# EAGLE board BMS-LV (EAGLE 7.5.0)
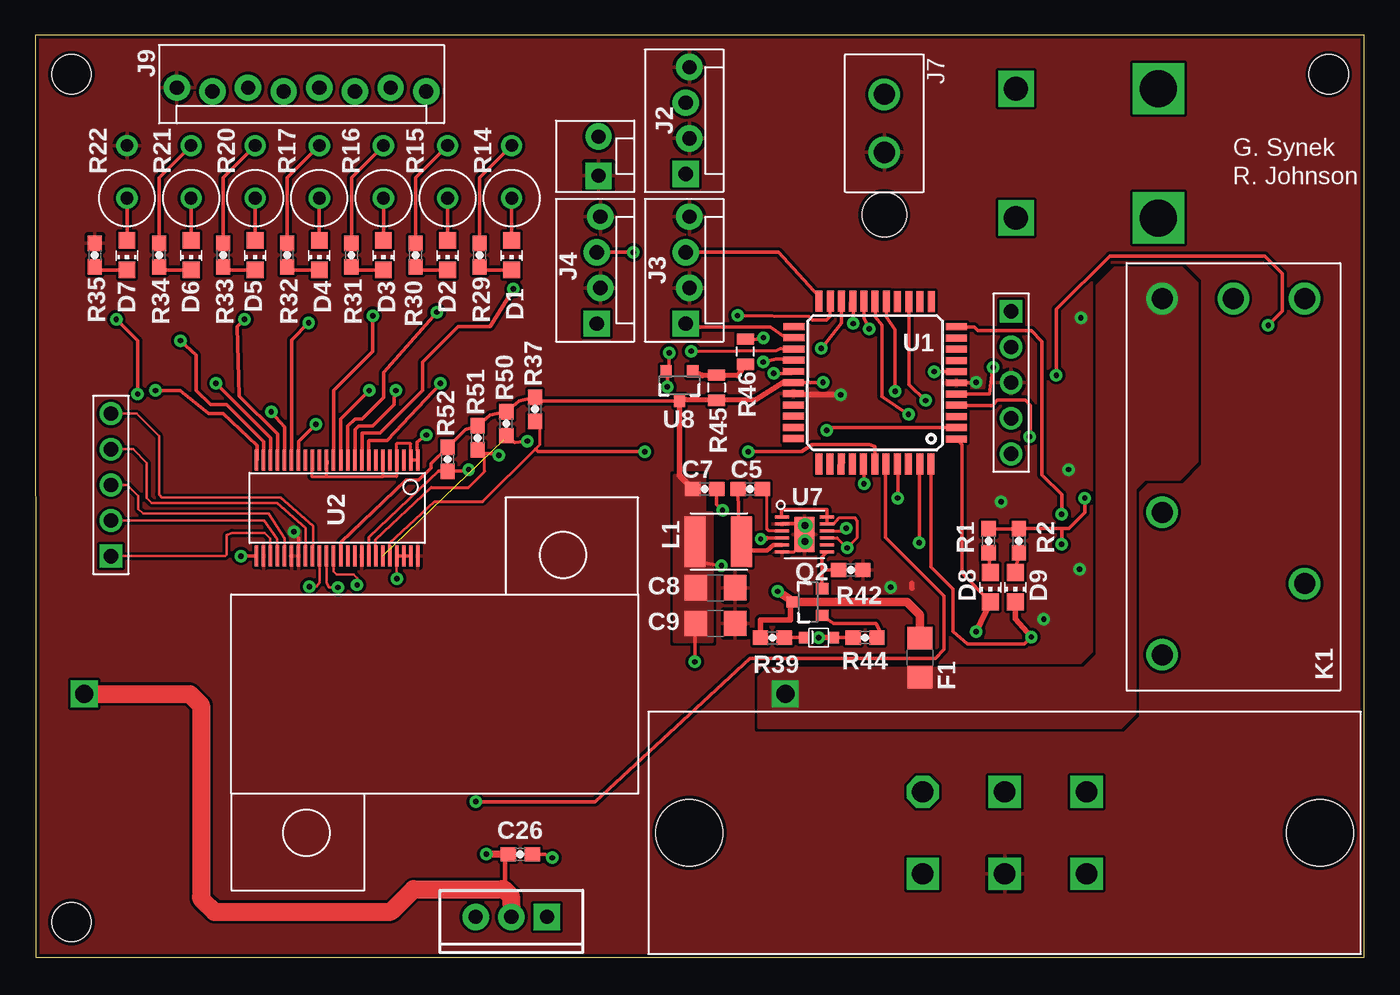
[diagram p0: board, top side]
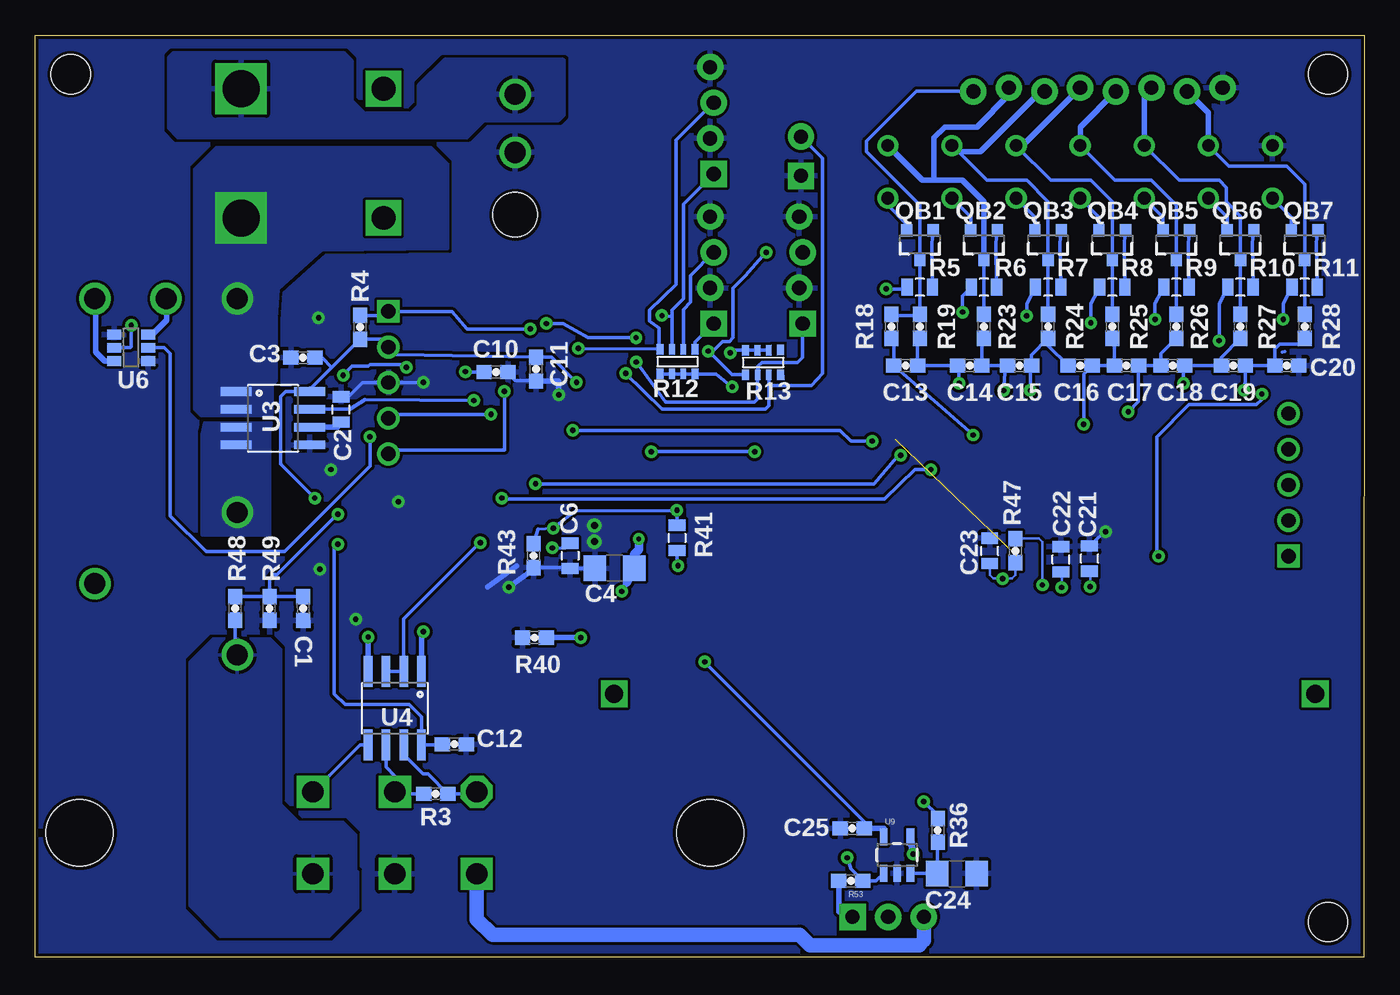
[diagram p1: board, bottom side, seen from below]

Size 94.79 x 65.79 mm. Coordinates in mm from the lower left corner, seen from the top.
Outline: 94.79,0 94.79,65.79 0,65.79 0.05,0 94.79,0
Copper layers (1*16): Top 0.035mm / dielectric 1.5mm / Bottom 0.035mm
Design rules "SparkFun *": minimum track width 7mil, minimum drill 12mil, track to track 8mil, track to pad 8mil, pad to pad 8mil, via to via 8mil, smd to smd 8mil, copper to edge 10mil, drill to drill 8mil, minimum pad ring 12mil, minimum via ring 10mil, stop-mask expansion 4mil, vias tented up to drill 25mil, thermal gap 10mil
Holes 2.8 mm at 92.25,62.99 2.59,62.99 2.59,2.54

## Footprints (pad centres in the part's own frame; a part is rotated, then mirrored left to right if it is on the bottom)
0603 = smd 1.1 x 1: 1 -0.85,0; 2 0.85,0
0805 = smd 0.8 x 1.2: 1 -0.9,0; 2 0.9,0
1206@1 = smd 1.6 x 1.8: 1 -1.4,0; 2 1.4,0
CHIP_LED0805 = smd 1.2 x 1.2: A 0,-1.05; C 0,1.05
SOD-323 = smd 0.65 x 0.85: P$1 -1.1,0; P$2 1.1,0
FUSECLIP-3550 = drill 2.642 square: 1 -4.61,5.08; 2 4.61,5.08 | drill 1.702 square: 3 4.61,-5.08; 4 -4.61,-5.08
5X.1 = drill 1.016 square: 1 -5.08,0 | drill 1.016: 2 -2.54,0; 3 0,0; 4 2.54,0; 5 5.08,0
MOLEX_1X4 = drill 1.016 pad 1.88 square: 1 -3.81,0.127 | drill 1.016 pad 1.88: 2 -1.27,-0.127; 3 1.27,0.127; 4 3.81,-0.127
MOLEX-1X2 = drill 1.016 pad 1.88 square: 1 -1.397,0 | drill 1.016 pad 1.88: 2 1.397,0
MOLEX-MX150L = drill 1.524 octagon: 1 -5.842,2.921 | drill 1.524 square: 2 0,2.921; 3 5.842,2.921; 4 -5.842,-2.921; 5 0,-2.921; 6 5.842,-2.921 | hole 4.775: -22.479,0; 22.479,0
1-770166-0 = drill 1.5: 1 -2.07,0; 2 2.07,0 | hole 3.18: 6.52,0
MOLEX-1X8-2 = drill 1.016 pad 1.88: 1 -8.89,0; 2 -6.35,-0.254; 3 -3.81,0; 4 -1.27,-0.254; 5 1.27,0; 6 3.81,-0.254; 7 6.35,0; 8 8.89,-0.254
ADJ14024 = drill 1.5: -8-S 0,5.08; -9-R 0,0; C 25.4,-5.08; C+ 0,-5.08; NC 20.32,5.08; NO 15.24,-5.08
SRN4018 = smd 1.5 x 3.6: P$1 -1.6,0; P$2 1.7,0
SOT23 = smd 0.8 x 0.9: 1 -0.95,-1; 2 0.95,-1; 3 0,1.1
TO-220 = drill 1 pad 1.88 square: 1 -2.54,0 | drill 1 pad 1.88: 2 0,0; 3 2.54,0
MNR14 = smd 0.5 x 0.75: 1 -1.25,-0.9; 4 1.25,-0.9; 5 1.25,0.85; 8 -1.25,0.85 | smd 0.4 x 0.75: 2 -0.4,-0.9; 3 0.4,-0.9; 6 0.4,0.85; 7 -0.4,0.85
RR02J16RTB = drill 0.9: P$1 -3.75,0; P$2 0,0
CHASSIS-MNT-RES-TE-HSA25 = drill 1.27 square: 1 -25,0; 2 25,0
TQFP-44 = smd 1.5 x 0.5: 1 -5.8,4; 2 -5.8,3.2; 3 -5.8,2.4; 4 -5.8,1.6; 5 -5.8,0.8; 6 -5.8,0; 7 -5.8,-0.8; 8 -5.8,-1.6; 9 -5.8,-2.4; 10 -5.8,-3.2; 11 -5.8,-4; 23 5.8,-4; 24 5.8,-3.2; 25 5.8,-2.4; 26 5.8,-1.6; 27 5.8,-0.8; 28 5.8,0; 29 5.8,0.8; 30 5.8,1.6; 31 5.8,2.4; 32 5.8,3.2; 33 5.8,4 | smd 0.5 x 1.5: 12 -4,-5.8; 13 -3.2,-5.8; 14 -2.4,-5.8; 15 -1.6,-5.8; 16 -0.8,-5.8; 17 0,-5.8; 18 0.8,-5.8; 19 1.6,-5.8; 20 2.4,-5.8; 21 3.2,-5.8; 22 4,-5.8; 34 4,5.8; 35 3.2,5.8; 36 2.4,5.8; 37 1.6,5.8; 38 0.8,5.8; 39 0,5.8; 40 -0.8,5.8; 41 -1.6,5.8; 42 -2.4,5.8; 43 -3.2,5.8; 44 -4,5.8
SSOP-48 = smd 0.25 x 1.524: 1 -5.75,-3.421; 2 -5.25,-3.421; 3 -4.75,-3.421; 4 -4.25,-3.421; 5 -3.75,-3.421; 6 -3.25,-3.421; 7 -2.75,-3.421; 8 -2.25,-3.421; 9 -1.75,-3.421; 10 -1.25,-3.421; 11 -0.75,-3.421; 12 -0.25,-3.421; 13 0.25,-3.421; 14 0.75,-3.421; 15 1.25,-3.421; 16 1.75,-3.421; 17 2.25,-3.421; 18 2.75,-3.421; 19 3.25,-3.421; 20 3.75,-3.421; 21 4.25,-3.421; 22 4.75,-3.421; 23 5.25,-3.421; 24 5.75,-3.421; 25 5.75,3.421; 26 5.25,3.421; 27 4.75,3.421; 28 4.25,3.421; 29 3.75,3.421; 30 3.25,3.421; 31 2.75,3.421; 32 2.25,3.421; 33 1.75,3.421; 34 1.25,3.421; 35 0.75,3.421; 36 0.25,3.421; 37 -0.25,3.421; 38 -0.75,3.421; 39 -1.25,3.421; 40 -1.75,3.421; 41 -2.25,3.421; 42 -2.75,3.421; 43 -3.25,3.421; 44 -3.75,3.421; 45 -4.25,3.421; 46 -4.75,3.421; 47 -5.25,3.421; 48 -5.75,3.421
SO-8 = smd 0.61 x 2.21: 1 -1.905,-2.616; 2 -0.635,-2.616; 3 0.635,-2.616; 4 1.905,-2.616; 5 1.905,2.616; 6 0.635,2.616; 7 -0.635,2.616; 8 -1.905,2.616
SC74-6 = smd 0.7 x 1: 1 -0.95,-1.2; 2 0,-1.2; 3 0.95,-1.2; 4 0.95,1.2; 5 0,1.2; 6 -0.95,1.2
DFN-12 = smd 0.23 x 1: 1 1.25,1.6; 2 0.75,1.6; 3 0.25,1.6; 4 -0.25,1.6; 5 -0.75,1.6; 6 -1.25,1.6; 7 -1.25,-1.6; 8 -0.75,-1.6; 9 -0.25,-1.6; 10 0.25,-1.6; 11 0.75,-1.6; 12 1.25,-1.6 | smd 2.5 x 1.4: 13 0,0
SOT23-5 = smd 0.55 x 1.2: 1 -0.95,-1.3; 2 0,-1.3; 3 0.95,-1.3; 4 0.95,1.3; 5 -0.95,1.3

## Placement (x,y rotation side)
C1  0.1uF  [0603]  75.67,24.89 270.3 bottom
C2  0.1uF  [0805]  72.97,39.09 90 bottom
C3  0.1uF  [0603]  75.69,42.77 180 bottom
C4  4.7uF  [1206@1]  53.47,27.76 180 bottom
C5  0.1uF  [0603]  50.99,33.41 0 top
C6  1uF  [0805]  56.64,28.65 270 bottom
C7  100pF  [0603]  47.75,33.41 0 top
C8  10uF  [1206@1]  48.51,26.37 0 top
C9  10uF  [1206@1]  48.51,23.83 0 top
C10  0.1uF  [0603]  61.93,41.76 0 bottom
C11  0.1uF  [0603]  59.08,41.96 270 bottom
C12  0.1uF  [0603]  64.9,15.21 0 bottom
C13  10nF  [0603]  32.72,42.21 0 bottom
C14  10nF  [0603]  28.14,42.21 0 bottom
C15  10nF  [0603]  24.59,42.21 0 bottom
C16  10nF  [0603]  20.27,42.21 0 bottom
C17  10nF  [0603]  16.97,42.21 0 bottom
C18  10nF  [0603]  13.67,42.21 0 bottom
C19  10nF  [0603]  9.35,42.21 0 bottom
C20  10nF  [0603]  5.54,42.21 0 bottom
C21  1uF  [0805]  19.61,28.45 90 bottom
C22  1uF  [0805]  21.64,28.4 90 bottom
C23  1uF  [0805]  26.72,29.01 90 bottom
C24  10uF  [1206@1]  29.06,5.99 0 bottom
C25  0.1uF  [0603]  36.53,9.22 180 bottom
C26  0.1uF  [0603]  34.59,7.37 180 top
D1  LED_GREEN  [CHIP_LED0805]  33.99,50.09 180 top
D2  LED_GREEN  [CHIP_LED0805]  29.41,50.09 180 top
D3  LED_GREEN  [CHIP_LED0805]  24.84,50.09 180 top
D4  LED_GREEN  [CHIP_LED0805]  20.27,50.09 180 top
D5  LED_GREEN  [CHIP_LED0805]  15.7,50.09 180 top
D6  LED_GREEN  [CHIP_LED0805]  11.13,50.09 180 top
D7  LED_GREEN  [CHIP_LED0805]  6.55,50.09 180 top
D8  LED_AMBER  [CHIP_LED0805]  68.12,26.42 180 top
D9  LED_GREEN  [CHIP_LED0805]  69.9,26.42 180 top
D10  22V  [SOD-323]  55.88,22.81 0 top
F1  0.12A 48V PTC  [1206@1]  63.09,21.39 90 top
F2  FUSE CLIPS  [FUSECLIP-3550]  75.03,57.35 270 top
J1  M1x5  [5X.1]  69.6,41 270 top
J2  M1x4  [MOLEX_1X4]  46.53,59.69 90 top
J3  M1x4  [MOLEX_1X4]  46.53,49.02 90 top
J4  M1x4  [MOLEX_1X4]  40.18,49.02 90 top
J5  M1x2  [MOLEX-1X2]  40.18,57.15 90 top
J6  MX150L  [MOLEX-MX150L]  69.14,8.89 0 top
J7  M2770166  [1-770166-0]  60.55,59.49 270 top
J8  M1x5  [5X.1]  5.41,33.71 90 top
J9  M80022232081-2  [MOLEX-1X8-2]  19,62.03 0 top
K1  ADJ14024  [ADJ14024]  85.45,46.99 270 top
L1  SRN4018-220M  [SRN4018]  48.77,29.67 180 top
Q2  40V 0.2A  [SOT23]  55.12,25.35 90 top
Q3  BDX34C  [TO-220]  33.96,2.9 180 top
QB1  MOS-P_DMP2305U-7  [SOT23]  31.7,50.85 180 bottom
QB2  MOS-P_DMP2305U-7  [SOT23]  27.13,50.85 180 bottom
QB3  MOS-P_DMP2305U-7  [SOT23]  22.56,50.85 180 bottom
QB4  MOS-P_DMP2305U-7  [SOT23]  17.98,50.85 180 bottom
QB5  MOS-P_DMP2305U-7  [SOT23]  13.41,50.85 180 bottom
QB6  MOS-P_DMP2305U-7  [SOT23]  8.84,50.85 180 bottom
QB7  MOS-P_DMP2305U-7  [SOT23]  4.27,50.85 180 bottom
R1  1k  [0603]  68,29.72 90 top
R2  1k  [0603]  70.15,29.72 90 top
R3  120  [0603]  66.22,11.68 0 bottom
R4  10k  [0603]  71.62,44.95 270 bottom
R5  3.3k  [0805]  31.7,47.8 180 bottom
R6  3.3k  [0805]  27.13,47.8 180 bottom
R7  3.3k  [0805]  22.56,47.8 180 bottom
R8  3.3k  [0805]  17.98,47.8 180 bottom
R9  3.3k  [0805]  13.41,47.8 180 bottom
R10  3.3k  [0805]  8.84,47.8 180 bottom
R11  3.3k  [0805]  4.27,47.8 180 bottom
R12  10k  [MNR14]  48.97,42.47 180 bottom
R13  10k  [MNR14]  42.88,42.47 0.1 bottom
R14  16  [RR02J16RTB]  33.99,54.15 270 top
R15  16  [RR02J16RTB]  29.41,54.15 270 top
R16  16  [RR02J16RTB]  24.84,54.15 270 top
R17  16  [RR02J16RTB]  20.27,54.15 270 top
R18  100  [0603]  33.73,45.01 90 bottom
R19  100  [0603]  31.7,45.01 270 bottom
R20  16  [RR02J16RTB]  15.7,54.15 270 top
R21  16  [RR02J16RTB]  11.13,54.15 270 top
R22  16  [RR02J16RTB]  6.55,54.15 270 top
R23  100  [0603]  27.13,45.01 90 bottom
R24  100  [0603]  22.56,45.01 90 bottom
R25  100  [0603]  17.98,45.01 90 bottom
R26  100  [0603]  13.41,45.01 90 bottom
R27  100  [0603]  8.84,45.01 90 bottom
R28  100  [0603]  4.27,45.01 90 bottom
R29  1k  [0603]  31.7,50.09 270 top
R30  1k  [0603]  27.13,50.09 270 top
R31  1k  [0603]  22.56,50.09 270 top
R32  1k  [0603]  17.98,50.09 270 top
R33  1k  [0603]  13.41,50.09 270 top
R34  1k  [0603]  8.84,50.09 270 top
R35  1k  [0603]  4.27,50.09 270 top
R36  1k  [0603]  30.43,9.07 270 bottom
R37  4.99k  [0603]  35.65,39.1 90 top
R38  0.5  [CHASSIS-MNT-RES-TE-HSA25]  28.5,18.8 180 top
R39  10k  [0603]  52.58,22.81 180 top
R40  10k  [0603]  59.18,22.81 0 bottom
R41  91k  [0805]  49.02,29.92 270 bottom
R42  47k  [0603]  58.17,27.64 180 top
R43  12.4k  [0603]  59.25,28.65 90 bottom
R44  10k  [0603]  59.18,22.81 0 top
R45  100k  [0805]  48.59,40.64 270 top
R46  1k  [0805]  50.65,43.21 90 top
R47  RES_0_1%  [0603]  24.89,29.01 270 bottom
R48  32.4k  [0603]  80.52,24.89 270 bottom
R49  5.36k  [0603]  78.08,24.89 90 bottom
R50  4.99k  [0603]  33.6,38.07 90 top
R51  4.99k  [0603]  31.55,37.06 90 top
R52  4.99k  [0603]  29.41,35.53 90 top
R53  100  [0603]  36.63,5.46 180 bottom
U1  PIC18F45K22  [TQFP-44]  59.89,41 179.9 top
U2  LTC6804-2  [SSOP-48]  21.54,32.05 180 top
U3  ACS712  [SO-8]  77.83,38.46 270 bottom
U4  SN75HVD08DRSOIC  [SO-8]  69.14,17.78 180 bottom
U6  NUD3160DMT1G  [SC74-6]  87.93,43.48 90 bottom
U7  ISL85415-FRZ-T7A  [DFN-12]  54.86,30.18 90 top
U8  BSS308PE  [SOT23]  45.95,40.79 180 top
U9  OPA344  [SOT23-5]  33.32,7.32 0 bottom

## Library data of the parts
C1 C3 C5 C10-C12 C25 C26 = FSAE Electric; PARTNO: CC0603ZRY5V9BB104
C2 = FSAE Electric; PARTNO: CL21B104KCC5PNC
C4 = FSAE Electric; PARTNO: GRM31CF51H475ZA01L
C6 C21-C23 = FSAE Electric; PARTNO: UMK212F105ZG-T
C7 = FSAE Electric; PARTNO: C1608C0G1H101J080AA
C8 C9 C24 = FSAE Electric; PARTNO: CL31A106KBHNNNE
C13-C20 = FSAE Electric; PARTNO: CL10F103ZB8NNNC
D1-D7 D9 = FSAE Electric; PARTNO: LTST-S220GKT
D8 = FSAE Electric; PARTNO: HSMA-C170
D10 = FSAE Electric; PARTNO: MM3Z22VT1G
F1 = FSAE Electric; PARTNO: 0ZCJ0012FF2E
F2 = FSAE Electric; PARTNO: 3550
J1 J8 = FSAE Electric; PARTNO: GENERIC
J2-J4 = FSAE Electric; PARTNO: 0022232041
J5 = FSAE Electric; PARTNO: 0022232021
J6 = FSAE Electric; PARTNO: 19427-0018
J7 = FSAE Electric; PARTNO: 1-770166-0
J9 = FSAE Electric; PARTNO: 0022232081
K1 = FSAE Electric; PARTNO: ADJ14024
L1 = FSAE Electric; PARTNO: SRN4018-220M
Q2 = FSAE Electric; PARTNO: MMBT3904LT1G
Q3 = FSAE Electric; PARTNO: BDX34C
QB1-QB7 = FSAE Electric; PARTNO: DMP2305U-7
R1 R2 R29-R36 = FSAE Electric; PARTNO: RC0603JR-071KL
R3 = FSAE Electric; PARTNO: RC0603FR-07120RL
R4 R39 R40 R44 = FSAE Electric; PARTNO: RC0603FR-0710KL
R5-R11 = FSAE Electric; PARTNO: RC0805FR-073K3L
R12 R13 = FSAE Electric; PARTNO: MNR14ERAPJ103
R14-R17 R20-R22 = FSAE Electric; PARTNO: RR02J16RTB
R18 R19 R23-R28 R53 = FSAE Electric; PARTNO: RC0603FR-07100RL
R37 R50-R52 = FSAE Electric; PARTNO: ERJ-3EKF4991V
R38 = FSAE Electric; PARTNO: 1676625-6
R41 = FSAE Electric; PARTNO: ERJ-6ENF9102V
R42 = FSAE Electric; PARTNO: RC0603FR-0747KL
R43 = FSAE Electric; PARTNO: RC0603FR-0712K4L
R45 = FSAE Electric; PARTNO: RC0805FR-07100KL
R46 = FSAE Electric; PARTNO: RC0805FR-071KL
R47 = FSAE Electric; PARTNO: CRCW06030000Z0EA
R48 = FSAE Electric; PARTNO: RC0603FR-0732K4L
R49 = FSAE Electric; PARTNO: RC0603FR-075K36L
U1 = FSAE Electric; PARTNO: PIC18F45K22T-I/PT
U2 = FSAE Electric; PARTNO: LTC6804IG-2#PBF
U3 = FSAE Electric; PARTNO: ACS712ELCTR-30A-T
U4 = FSAE Electric; PARTNO: SN75HVD08DR
U6 = FSAE Electric; PARTNO: NUD3160DMT1G
U7 = FSAE Electric; PARTNO: ISL85415FRZ-T7A
U8 = FSAE Electric; PARTNO: BSS308PE H6327
U9 = FSAE Electric; PARTNO: OPA344NA/3K

## Nets
+5V: C3.1 C7.1 C8.1 C9.1 C11.1 C12.1 C25.1 J1.2 L1.P$2 R1.2 R2.2 R4.2 R37.2 R41.2 R45.2 R50.2 R51.2 R52.2 U1.28 U2.37 U3.8 U4.8 U8.3 U9.5
+36V: J6.4 Q3.3
ASENSE: U1.14 U3.7
BATTFUSED: F1.1 F2.2 K1.C+ R38.1 U3.1 U3.2
BATTPACK+: J9.8 QB1.3 R18.2 R19.1
CHARGECTRL: R36.1 U1.40
CLK: R51.1 U1.38 U2.42
CS: R52.1 U1.41 U2.41
GND: C1.2 C2.2 C3.2 C4.2 C6.2 C8.2 C9.2 C10.2 C11.2 C12.2 C20.2 C21.2 C22.2 C23.2 C24.2 C25.2 J1.3 J2.2 J2.4 J3.2 J3.4 J4.2 J4.4 J5.1 J6.5 J7.2 J9.1 R22.P$1 R35.1 R40.1 R42.1 R43.1 R49.1 U1.6 U1.29 U2.26 U2.30 U2.31 U2.40 U2.48 U3.5 U6.1 U6.4 U7.2 U7.6 U7.13 U9.2
GPIO1: J8.1 U2.27
GPIO2: J8.2 U2.28
GPIO3: J8.3 U2.29
GPIO4: J8.4 U2.32
GPIO5: J8.5 U2.33
I/O: J6.6 K1.C R48.2
MISO: R37.1 U1.39 U2.44
MOSI: R50.1 U1.2 U2.43
N$1: D8.A R1.1
N$2: C13.2 C14.1 R19.2 U2.8
N$3: D9.A R2.1
N$4: C14.2 C15.1 R23.1 U2.10
N$5: F2.1 J7.1
N$6: J6.3 U4.5
N$7: K1.-8-S U6.6
N$9: C15.2 C16.1 R24.1 U2.12
N$10: J1.4 U1.17
N$11: R45.1 R46.1 U8.1
N$12: R47.1 U2.36
N$13: D1.C R29.2
N$14: C24.1 R36.2 U9.3
N$15: K1.NO U3.3 U3.4
N$16: C17.2 C18.1 R26.1 U2.20
N$17: Q3.1 R53.2
N$20: K1.-9-R U6.3
N$21: C26.1 R53.1 U9.1
N$22: D2.C R30.2
N$23: C26.2 Q3.2 R38.2 U9.4
N$24: C4.1 F1.2 Q2.3 R39.2 U7.4
N$27: C2.1 U3.6
N$28: D10.P$2 R40.2 R44.1
N$29: J6.2 R3.1 U4.6
N$30: D10.P$1 R39.1
N$31: Q2.2 R42.2 U7.7
N$32: C5.2 U7.3
N$33: J6.1 R3.2 U4.7
N$34: J9.2 QB7.3 R21.P$1 R28.2 R34.1
N$35: C6.1 U7.1 U7.9 U7.11 U7.12
N$36: C5.1 L1.P$1 U7.5
N$38: C18.2 C19.1 R27.1 U2.22
N$39: J1.5 U1.16
N$40: C19.2 C20.1 R28.1 U2.24
N$41: D3.C R31.2
N$42: Q2.1 R44.2
N$43: D4.C R32.2
N$44: D5.C R33.2
N$46: QB5.1 R9.1
N$47: D6.C R34.2
N$48: D5.A QB5.2 R20.P$2
N$49: QB3.1 R7.1
N$50: J9.3 QB6.3 R20.P$1 R27.2 R33.1
N$52: QB7.1 R11.1
N$53: J9.4 QB5.3 R17.P$1 R26.2 R32.1
N$54: D7.A QB7.2 R22.P$2
N$56: D7.C R35.2
N$57: QB6.1 R10.1
N$58: J1.1 R4.1 U1.18
N$64: D6.A QB6.2 R21.P$2
N$66: C7.2 R41.1 R43.2 U7.10
N$67: J9.7 QB2.3 R14.P$1 R23.2 R29.1
N$68: J9.6 QB3.3 R15.P$1 R24.2 R30.1
N$69: J9.5 QB4.3 R16.P$1 R25.2 R31.1
N$70: QB1.1 R5.1
N$71: D1.A QB1.2 R14.P$2
N$72: QB2.1 R6.1
N$73: D2.A QB2.2 R15.P$2
N$74: D3.A QB3.2 R16.P$2
N$76: QB4.1 R8.1
N$77: D4.A QB4.2 R17.P$2
N$78: R12.5 R12.6 R12.7 R12.8 R13.6 R13.7 R13.8 U8.2
N$79: C16.2 C17.1 R25.1 U2.18
RSET: U1.5 U6.5
RX1: D8.C U1.1 U4.1
S1: R11.2 U2.25
S2: R10.2 U2.23
S3: R9.2 U2.21
S4: R8.2 U2.19
S7: R7.2 U2.13
S8: R6.2 U2.11
S9: R5.2 U2.9
SET: U1.4 U6.2
SHORT: C13.1 R18.1 U2.1 U2.2 U2.4 U2.6 U2.14 U2.16
TEMP1: J2.3 R12.4 U1.20
TEMP2: J2.1 R12.3 U1.21
TEMP3: J3.3 R12.2 U1.22
TEMP4: J3.1 R12.1 U1.24
TEMP5: J4.3 R13.1 U1.25
TEMP6: J4.1 R13.2 U1.26
TEMP7: J5.2 R13.3 U1.27
TFET: R46.2 U1.19
TX1: D9.C U1.44 U4.4
U4: U1.43 U4.2 U4.3
VDD1: C10.1 U1.7
VEXTERNAL: C1.1 R48.1 R49.2 U1.11
VREF1: C22.1 U2.35
VREF2: C21.1 U2.34
VREG: C23.1 R47.2 U2.45 U2.46 U2.47

## Tracks (layer width: path | path; a pad name or v marks a point on that pad's centre or on a via)
+5V  (via drill 0.38)
  Top 0.254: v56.18,41.02 54.11,41.02 U1.28 | R1.2 R2.2 69.69,30.61 73.2,30.61 | U8.3 35.53,39.69 R37.2 34.51,39.7 R50.2 32.44,38.67 R51.2 30.68,37.66 R52.2 28.24,35.22 28.24,34.92 27.36,34.04 26.47,34.04 21.79,29.61 U2.37 | v74.85,32.77 74.85,31.75 73.71,30.61 73.2,30.61 | 46.9,30.09 L1.P$2 47.32,28.45 47.29,28.45 47.29,28.19 v48.95,27.94 | v47.04,21.08 47.04,24.01 C9.1 | v73.2,29.46 73.2,30.61
  Top 0.406: U1.28 54.08,41.02 53.31,41.02 51.4,39.79 R45.2 46.43,39.79 U8.3 45.95,34.37 C7.1
  Bottom 0.254: 75.21,40.5 U3.8 76.91,40.36 77.27,40.01 77.27,35.18 v74.85,32.77 | 75.21,40.5 73.63,42.08 | 73.63,42.08 R4.2 70.16,44.09 J1.2 69.06,43 C11.1 57.97,42.81 v56.18,41.02 | C12.1 65.9,15.16 U4.8 67.23,17.14 68.12,18.03 72.69,18.03 73.46,18.8 73.46,29.21 v73.2,29.46 | 75.21,40.5 75.21,40.6 | C3.1 74.32,42.77 73.63,42.08 | C25.1 35.67,9.72 v47.04,21.08 | R41.2 49.07,29.02 v48.95,27.94
  Bottom 0.406: C25.1 34.27,9.22 U9.5
  pour Top (no thermals): 47.75,34.37 47.75,31.7 48.26,31.7 48.26,22.56 45.59,22.56 45.59,34.37
+36V
  Bottom 1.016: J6.4 63.3,2.74 62.18,1.63 40.28,1.63 39.52,0.86 31.75,0.86 31.39,1.22 31.39,2.87 Q3.3
ASENSE  (via drill 0.38)
  Top 0.254: U1.14 62.3,40.87 v63.5,39.73
  Bottom 0.254: v63.5,39.73 71.25,39.78 72.31,39.12 75.18,39.12 U3.7
BATTFUSED
  pour Top (no thermals): 51.61,16.41 51.61,19.96 52.27,20.62 74.78,20.62 75.74,21.59 75.74,47.9 77.01,49.17 81.79,49.17 82.85,48.11 82.85,35.36 81.64,34.14 79.15,34.14 78.44,33.43 78.44,17.42 77.42,16.41
  pour Bottom (no thermals): 77.9,40.79 77.88,38.66 82.96,38.66 83.41,39.12 83.41,56.24 81.89,57.76 66.55,57.76 65.38,56.59 65.38,50.55 74.37,50.44 77.47,47.65 77.6,45.62 77.6,41.1
BATTPACK+
  Bottom 0.254: J9.8 31.95,61.77 35.51,58.22 35.51,57.45 31.7,53.65 QB1.3 R19.1 31.86,45.86 31.95,45.77 33.64,45.77 R18.2 33.9,46.02
CHARGECTRL  (via drill 0.38)
  Top 0.254: v31.42,11.11 39.93,11.11 50.98,21.34 64.19,21.34 64.82,21.97 64.82,25.78 60.63,29.97 60.63,35.14 U1.40
  Bottom 0.254: R36.1 30.43,10.12 v31.42,11.11
CLK  (via drill 0.38)
  Top 0.203: U2.42 24.29,29.83 28.24,33.53 30.91,33.53 32.05,34.67 32.05,35.95
  Top 0.254: 24.28,28.54 U2.42 | v59.11,33.78 59.11,35.17 U1.38 | R51.1 32.05,35.95 32.68,35.95 v33.07,35.81
  Bottom 0.254: 58.98,33.91 v59.11,33.78 34.98,33.78 33.32,35.69 v33.07,35.81
CS  (via drill 0.38)
  Top 0.203: 28.77,34.69 23.8,29.97 23.8,28.64
  Top 0.254: 28.77,34.69 R52.1 30.42,34.69 v30.91,34.8 | 23.8,28.64 U2.41 | v61.52,32.77 61.52,35.16 U1.41
  Bottom 0.254: v30.91,34.8 32.05,34.8 34.21,32.7 61.39,32.7 v61.52,32.77
GND  (via drill 0.38, 0.5)
  Top 0.203: U7.6 54.12,28.93 v54.91,29.65
  Top 0.254: U7.13 54.86,30.68 | 54.86,30.68 54.61,30.94 53.28,30.94 U7.2 | 55.37,31.19 v54.91,30.8 54.86,30.68 | 50.22,24.13 C9.2 | v67.11,41.02 65.73,41.02 | U2.31 18.79,29.91 v18.47,30.35
  Top 0.406: 55.37,31.19 55.12,31.19 | 65.73,41.02 U1.6 | 61.01,26.11 v61.01,26.42 | v57.45,40.13 54.09,40.13 U1.29 | 62.53,26.36 62.53,26.67
  Bottom 0.254: C4.2 C6.2 56.69,27.8 R43.1 | C2.2 72.5,39.94 71.42,41.02 69.62,41.02 | J1.3 67,41 | v18.47,30.35 18.98,29.97 C21.2 | C10.2 61.18,41.76 60.57,41.15 59.42,41.15 C11.2
  Bottom 0.406: 69.62,41.02 J1.3 | 67,41 v67.11,41.02 | v61.01,26.42 58.93,27.94 R43.1 | C11.2 57.45,41.11 v57.45,40.13 | 62.53,26.42 60.45,27.94
  other vias: 68.88,32.51 74.47,27.69 71.93,24.13 73.71,34.8 74.57,45.62
  pour Top (rank 6): 0.05,0 0,65.79 94.79,65.79 94.79,0
  pour Bottom (rank 6): 0.05,0 0,65.79 94.74,65.79 94.54,0
GPIO1
  Top 0.178: J8.1 13.54,28.63 13.66,28.75 13.66,30.15 14.05,30.28 16.36,30.28 16.76,29.87 16.76,28.66 U2.27
  Top 0.254: 16.79,28.51 U2.27
GPIO2
  Top 0.178: J8.2 16.33,31.17 17.27,29.84 17.27,28.65 U2.28
GPIO3
  Top 0.178: J8.3 6.58,33.71 7.37,32.92 7.37,32 7.72,31.65 16.66,31.65 17.78,29.9 17.78,28.64 U2.29
GPIO4
  Top 0.178: J8.4 6.98,36.25 7.98,35.26 7.98,32.77 8.33,32.41 17.27,32.41 19.3,30.63 19.3,28.65 U2.32
GPIO5
  Top 0.178: J8.5 7.24,38.79 8.84,37.19 8.84,33.02 9.04,32.82 17.53,32.82 19.81,30.79 19.81,28.66 U2.33
I/O
  Bottom 0.254: R48.2 80.52,21.74 K1.C
  pour Bottom: 71.81,5.97 71.81,3.56 73.84,1.52 81.58,1.52 83.74,3.68 83.74,21.08 82.09,22.73 78.03,22.73 77.27,21.97 77.27,10.92 76,9.65 72.82,9.65 71.93,8.76 71.93,6.22 71.81,6.1
MISO  (via drill 0.38)
  Top 0.203: U2.44 25.29,29.56 28.5,32.51 31.93,32.51 35.67,36.26 35.99,36.58 35.99,38.09
  Top 0.254: 35.99,38.09 R37.1 | U1.39 59.88,36.43 59.49,36.58 55.42,36.58 54.66,36.07 v50.85,36.07 | v43.48,36.07 35.86,36.07 35.67,36.26
  Bottom 0.254: v50.85,36.07 v43.48,36.07
MOSI  (via drill 0.38)  (1 unrouted)
  Top 0.254: 33.45,36.95 R50.1 34.2,36.72 v35.1,36.83 | U1.2 56.63,37.78 v56.44,37.59
  Bottom 0.254: v56.44,37.59 37.39,37.59 36.63,36.83 v35.1,36.83
N$1
  Top 0.254: D8.A R1.1
N$2  (via drill 0.38)
  Top 0.254: U2.8 23.79,36.84 23.82,36.88 25.09,36.88 v28.9,40.95
  Bottom 0.254: R19.2 31.86,43.99 C13.2 C14.1 28.9,42.13 v28.9,40.95
N$3
  Top 0.254: D9.A R2.1
N$4  (via drill 0.38)
  Top 0.254: U2.10 22.81,36.63 22.81,37.64 23.06,37.9 24.08,37.9 25.6,39.42 25.6,39.93 v25.73,40.44
  Bottom 0.254: R23.1 27.29,43.99 C14.2 C15.1 25.6,42.05 v25.73,40.44
N$5
  pour Bottom: 57.2,64.01 65.52,64.01 67.36,62.17 67.36,60.71 67.93,60.13 71.36,60.13 72.25,61.02 72.25,63.88 72.82,64.45 84.89,64.45 85.2,64.14 85.2,59.18 84.57,58.55 64.06,58.55 62.85,59.75 57.52,59.75 57.14,60.13 57.14,63.94
N$6
  Bottom 0.254: U4.5 71.63,15.16 J6.3
N$7
  Bottom 0.406: U6.6 89.83,42.53 90.47,43.18 90.47,46.94 K1.-8-S
N$8
  Bottom 0.254: 5.66,43.23 5.85,43.18
N$9  (via drill 0.38)
  Top 0.254: U2.12 21.79,38.4 v23.82,40.44
  Bottom 0.254: C16.1 22.55,43.65 R24.1 23.74,42.98 C15.2 23.82,42.13 v23.82,40.44
N$10  (via drill 0.38)
  Top 0.254: v62.28,38.73 60.38,40.01 60.38,45.09 59.93,45.66 59.93,46.74 U1.17
  Bottom 0.254: v62.28,38.73 69.58,38.73 J1.4
N$11
  Top 0.406: R46.1 50.12,41.49 R45.1 47.58,41.49 U8.1
N$12  (via drill 0.38)
  Top 0.178: U2.36 21.29,27.53 21.49,27.33 22.71,27.33 22.96,27.08 v22.96,26.57
  Bottom 0.178: v22.96,26.57 22.96,29.62 23.22,29.87 24.88,29.87 R47.1
N$13
  Top 0.254: D1.C 31.9,49.04 R29.2
N$14
  Bottom 0.254: U9.3 32.35,5.99 C24.1 30.46,8.19 R36.2
N$15
  pour Bottom (no thermals): 78.08,30.12 82.85,30.12 82.88,30.15 82.88,37.29 82.7,38.1 77.93,38.1 78.08,37.74
N$16  (via drill 0.38)
  Top 0.254: v16.84,38.91 17.79,37.84 U2.20
  Bottom 0.254: C17.2 C18.1 14.51,43.05 R26.1 | 15.95,42.05 C17.2 | v16.84,38.91 16.12,39.64 C17.2
N$17
  Bottom 0.406: R53.2 37.48,3.26 Q3.1
N$20
  Bottom 0.406: U6.3 86.43,44.44 85.39,45.47 85.39,46.94 K1.-9-R
N$21  (via drill 0.38)
  Top 0.254: C26.1 36.37,7.37 v36.88,7.11
  Bottom 0.254: v36.88,7.11 36.63,6.31 R53.1 34.83,5.46 U9.1
N$22
  Top 0.254: D2.C 27.33,49.04 R30.2
N$23  (via drill 0.38)
  Top 0.254: 33.96,7.15 C26.2
  Top 0.305: 33.29,4.88 arc-45 33.38,5.09 33.53,5.23 33.53,7.02 arc-45 33.62,7.24 C26.2
  Top 0.508: C26.2 v32.18,7.37
  Top 1.27: R38.2 10.89,18.8 arc-45 11.12,18.7 11.84,17.98 11.84,4.35 arc45 11.93,4.12 12.8,3.25 25.22,3.25 arc45 25.44,3.34 26.97,4.88 33.29,4.88 arc-45 33.52,4.78 33.93,4.37 33.98,3.01 arc45 Q3.2
  Bottom 0.254: 32.31,8.43 U9.4
  Bottom 0.508: v32.18,7.37 32.31,8.43
N$24  (via drill 0.33, 0.38)
  Top 0.203: 53.25,29.91 U7.4
  Top 0.254: Q2.3 54.02,25.43 | 52.18,29.91 53.25,29.91
  Top 0.305: v51.74,29.84 52.12,29.84 52.18,29.91
  Top 0.406: Q2.3 53.85,25.35 53.85,24.08 51.73,24.08 R39.2
  Top 0.61: 54.02,25.43 v52.96,26.11 | Q2.3 62.18,25.35 63.09,24.43 F1.2
  Bottom 0.203: C4.1 52.07,28.76
  Bottom 0.406: v52.96,26.11 52.58,26.75
  Bottom 0.61: 52.58,26.75 C4.1 | 52.07,28.76 51.74,29.08 v51.74,29.84
N$27
  Bottom 0.406: U3.6 73.23,37.82 C2.1
N$28  (via drill 0.38)
  Top 0.254: D10.P$2 R44.1
  Top 0.406: D10.P$2 v55.88,22.81
  Bottom 0.406: v55.88,22.81 R44.1
N$29
  Bottom 0.254: R3.1 69.01,11.68 J6.2 69.14,12.95 69.77,13.59 U4.6
N$30
  Top 0.254: D10.P$1 R39.1
N$31
  Top 0.254: 56.22,26.2 Q2.2 56.12,27.64 | 56.12,27.64 56.12,28.58 U7.7 | R42.2 56.12,27.64
  Top 0.406: 56.12,26.2 Q2.2
N$32
  Top 0.203: U7.3 52.3,30.43 52.18,30.54 52.18,33.07 C5.2
N$33
  Bottom 0.254: J6.1 63.42,11.68 R3.2 66.76,13.08 67.11,13.08 68.5,14.48 U4.7
N$34
  Top 0.254: R34.1 8.84,55.62 R21.P$1
  Bottom 0.254: R21.P$1 9.66,56.44 5.54,56.44 4.27,55.17 QB7.3 R28.2
  Bottom 0.381: R21.P$1 11.12,60.25
  Bottom 0.406: 11.12,60.25 J9.2
N$35  (via drill 0.38)
  Top 0.203: U7.11 56.95,30.93 57.33,31.37 58.47,31.37 58.6,31.18 58.6,29.91 v57.9,29.21 57.18,29.93 U7.9
  Top 0.254: U7.11 U7.12 56.46,31.95 53.21,31.95 53.21,31.43 U7.1
  Bottom 0.203: v57.9,29.21 56.98,29.21 C6.1
N$36
  Top 0.254: C5.1 50.2,30.09 | 53.25,29.41 U7.5
  Top 0.305: 50.8,29.03 52.2,29.03 52.64,29.41 53.25,29.41
  Top 0.508: 50.2,30.09 L1.P$1 50.8,29.03
N$38  (via drill 0.38)
  Top 0.254: U2.22 16.79,37.06 v12.9,40.95
  Bottom 0.254: R27.1 10.2,42.8 C19.1 C18.2 12.9,42.13 v12.9,40.95
N$39  (via drill 0.38)
  Top 0.254: v61.33,40.39 61.33,44.77 60.69,45.66 60.69,46.67 U1.16
  Bottom 0.254: v61.33,40.39 61.33,36.2 69.58,36.2 J1.5
N$40  (via drill 0.38)
  Top 0.254: v8.58,40.44 10.36,40.44 12.39,38.79 13.41,38.79 15.82,36.5 15.82,35.48 U2.24
  Bottom 0.254: R28.1 4.69,43.74 6.04,43.74 6.39,43.4 C20.1 C19.2 8.5,41.03 v8.58,40.44
N$41
  Top 0.254: D3.C 22.75,49.04 R31.2
N$42
  Top 0.254: R44.2 60.29,23.23 59.94,23.82 56.95,23.82 Q2.1
N$43
  Top 0.254: D4.C 18.18,49.04 R32.2
N$44
  Top 0.254: D5.C 13.61,49.04 R33.2
N$46
  Bottom 0.254: R9.1 12.56,50.99 QB5.1
N$47
  Top 0.254: D6.C 9.04,49.04 R34.2
N$48
  Top 0.254: D5.A R20.P$2
  Bottom 0.254: QB5.2 14.36,52.82 R20.P$2
N$49
  Bottom 0.254: R7.1 21.7,50.99 QB3.1
N$50
  Top 0.254: R33.1 13.41,55.62 R20.P$1
  Bottom 0.254: R20.P$1 13.22,55.42 10.36,55.42 9.85,54.91 9.85,53.9 8.84,52.88 QB6.3 R27.2
  Bottom 0.381: R20.P$1 15.7,61.52 J9.3
N$52
  Bottom 0.254: R11.1 3.42,50.99 QB7.1
N$53
  Top 0.254: R32.1 17.98,55.62 R17.P$1
  Bottom 0.254: R17.P$1 17.79,55.42 15.19,55.42 13.41,53.65 QB5.3 R26.2
  Bottom 0.381: R17.P$1 20.27,59.23 J9.4
N$54
  Top 0.254: D7.A R22.P$2
  Bottom 0.254: QB7.2 5.22,52.82 R22.P$2
N$56
  Top 0.254: D7.C 4.47,49.04 R35.2
N$57
  Bottom 0.254: R10.1 7.99,50.99 QB6.1
N$58  (via drill 0.38)
  Top 0.254: v59.49,44.83 59.11,45.59 U1.18
  Bottom 0.254: R4.1 69.88,45.8 J1.1 65.05,46.08 63.99,44.83 v59.49,44.83
N$64
  Top 0.254: D6.A R21.P$2
  Bottom 0.254: QB6.2 9.79,52.82 R21.P$2
N$66  (via drill 0.38)
  Top 0.203: U7.10 57.66,30.43 v57.85,30.62
  Top 0.254: U7.10 | C7.2 48.6,32.31 v49.02,31.89
  Bottom 0.203: 58.93,30.56 v57.85,30.62
  Bottom 0.254: R41.1 v49.02,31.89 56.26,31.83 v57.85,30.62 | R43.2 58.93,30.56
N$67
  Top 0.254: R29.1 31.7,55.62 R14.P$1
  Bottom 0.254: 27.13,45.77 R23.2 QB2.3 | J9.7 25.35,61.52 | 30.68,55.68 30.94,55.42
  Bottom 0.381: QB2.3 27.13,53.9 28.65,55.42 30.94,55.42 31.5,55.42 R14.P$1 | 25.35,61.52 27.63,59.23 29.92,59.23 30.68,58.47 30.68,55.68
N$68
  Top 0.254: R30.1 27.13,55.62 R15.P$1
  Bottom 0.254: 29.41,57.96 R15.P$1 28.96,57.45 26.93,55.42 24.08,55.42 22.55,53.9 QB3.3 R24.2 | J9.6 23.06,61.77
  Bottom 0.381: 23.06,61.77 27.38,57.45 28.96,57.45
N$69
  Top 0.254: R31.1 22.55,55.62 R16.P$1
  Bottom 0.254: R25.2 QB4.3 17.98,53.9 19.51,55.42 22.36,55.42 R16.P$1 24.39,57.9
  Bottom 0.381: 24.39,57.9 J9.5
N$70
  Bottom 0.254: R5.1 30.85,50.99 QB1.1
N$71
  Top 0.254: 33.98,51.1 D1.A R14.P$2
  Bottom 0.254: QB1.2 32.65,52.31 33.98,53.65 R14.P$2
N$72
  Bottom 0.254: R6.1 26.28,50.99 QB2.1
N$73
  Top 0.254: D2.A R15.P$2
  Bottom 0.254: QB2.2 28.08,52.82 R15.P$2
N$74
  Top 0.254: D3.A R16.P$2
  Bottom 0.254: QB3.2 23.5,52.82 R16.P$2
N$76
  Bottom 0.254: R8.1 17.13,50.99 QB4.1
N$77
  Top 0.254: D4.A R17.P$2
  Bottom 0.254: QB4.2 18.93,52.82 R17.P$2
N$78  (via drill 0.38)
  Top 0.254: 45.01,41.66 U8.2 | v45.21,43.13 45.21,42.01 U8.2 | v45.08,40.69 45.08,41.71 U8.2
  Bottom 0.254: R12.5 R12.6 R12.7 R12.8 46.24,41.62 v45.08,40.69 | v45.21,43.13 44.87,43.32 R13.8 R13.7 R13.6
N$79  (via drill 0.38)
  Top 0.254: U2.18 18.79,36.8 v20.01,38.02
  Bottom 0.254: R25.1 17.82,43.99 C17.1 C16.2 20.01,41.62 v20.01,38.02
RSET  (via drill 0.38)
  Top 0.254: U1.5 68.05,40.19 v68.31,42.1 | v72.82,41.53 72.82,46.23 76.63,50.04 87.68,50.04 88.95,48.77 88.95,46.1 v87.93,45.09
  Bottom 0.254: v72.82,41.53 72.19,42.16 71.04,42.16 70.92,42.29 68.5,42.29 v68.31,42.1 | U6.5 88.01,43.48 87.93,43.56 v87.93,45.09
RX1  (via drill 0.38)
  Top 0.254: D8.C 66.09,27.43 66.09,36.58 U1.1
  Top 0.406: D8.C v67.11,23.24
  Bottom 0.406: v67.11,23.24 67.23,23.24 U4.1
S1  (via drill 0.38)
  Top 0.254: v7.31,40.18 7.31,43.99 v5.79,45.52 | v14.68,28.63 U2.25
  Bottom 0.254: v5.79,45.52 5.79,46.62 R11.2 | v7.31,40.18 7.31,39.8 7.7,39.42 12.52,39.42 14.81,37.13 14.81,28.75 v14.68,28.63
S2  (via drill 0.38)
  Top 0.254: U2.23 16.29,36.8 13.66,39.42 12.52,39.42 11.51,40.44 11.51,42.98 v10.36,43.99
  Bottom 0.254: v10.36,43.99 10.36,46.62 R10.2
S3  (via drill 0.38)
  Top 0.254: v14.93,45.52 14.43,45.01 14.55,40.06 17.29,37.32 U2.21
  Bottom 0.254: v14.93,45.52 14.93,46.62 R9.2
S4  (via drill 0.38)
  Top 0.254: v19.51,45.26 18.29,44.05 U2.19
  Bottom 0.254: v19.51,45.26 19.51,46.62 R8.2
S7  (via drill 0.38)
  Top 0.254: U2.13 21.29,40.44 24.08,43.23 v24.08,45.77
  Bottom 0.254: v24.08,45.77 24.08,46.62 R7.2
S8  (via drill 0.38)
  Top 0.254: U2.11 22.3,36.75 22.3,37.9 22.81,38.41 23.32,38.41 24.84,39.93 24.84,41.71 v28.65,46.02
  Bottom 0.254: v28.65,46.02 28.65,47.18 R6.2
S9  (via drill 0.38)
  Top 0.254: U2.9 23.32,36.63 23.32,37.39 24.59,37.39 27.63,40.44 27.63,42.47 30.17,45.01 32.46,45.01 v34.11,47.68
  Bottom 0.254: v34.11,47.68 32.73,47.68 R5.2
SET  (via drill 0.38)
  Top 0.254: U1.4 65.71,39.37 68.25,39.37 68.63,39.75 70.6,39.75 70.98,39.37 70.98,37.21 v70.92,37.15
  Bottom 0.254: U6.2 85.57,43.48 85.14,43.05 85.14,31.5 82.6,28.96 77.01,28.96 70.92,35.05 v70.92,37.15
SHORT  (via drill 0.38)
  Top 0.203: U2.2 26.78,36.64 25.77,36.64 25.77,35.5 U2.4 25.77,35.45 25.77,34.29 24.82,34.29 | 24.82,34.29 U2.6 | U2.14 20.82,35.45 20.75,34.29 | 20.75,34.29 24.82,34.29 | U2.16 19.74,35.42 19.74,34.29 20.75,34.29
  Top 0.254: v27.89,37.26 27.25,36.74 U2.1 U2.2
  Bottom 0.254: R18.1 33.56,43.99 C13.1 33.48,42.13 v27.89,37.26
TEMP1  (via drill 0.38)
  Top 0.254: U1.20 57.5,45.26 v56.06,43.43
  Bottom 0.203: v56.06,43.43 50.29,43.43
  Bottom 0.254: R12.4 50.29,43.43 50.29,44.9 50.98,45.4 50.98,46.16 49.07,48.01 49.07,58.29 J2.3
TEMP2  (via drill 0.38)
  Top 0.254: U1.21 56.7,46.75 56.69,46.74 56.69,45.72 56.44,45.47 55.42,45.47 55.17,45.72 v50.09,45.78
  Bottom 0.254: R12.3 49.37,45.72 | 49.37,45.72 49.37,46.18 48.56,46.99 48.56,53.72 J2.1 | v50.09,45.78 49.37,45.72
TEMP3
  Top 0.254: U1.22 55.9,47.14 53.01,50.29 J3.3
  Bottom 0.254: R12.2 48.57,46.22 48.06,46.74 48.06,48.64 J3.3
TEMP4
  Top 0.254: U1.24 53.51,44.21 52.44,44.96 46.76,44.96 J3.1
  Bottom 0.254: R12.1 47.72,43.9 J3.1
TEMP5  (via drill 0.38)
  Top 0.203: v46.79,43.24 49.71,43.24 49.96,43.26 52.82,43.26 53.2,43.43 54.07,43.43
  Top 0.254: 54.07,43.43 U1.25 | v42.66,50.29 J4.3
  Bottom 0.254: v46.79,43.24 46.72,43.24 46.47,43.24 45.77,43.94 45.26,43.94 45.01,44.2 45.01,47.75 44.13,48.63 v42.66,50.29 | 46.65,43.32 v46.79,43.24 | R13.1 45.11,41.57 v46.79,43.24
TEMP6  (via drill 0.38)
  Top 0.254: v51.92,42.47 52.83,42.67 54.03,42.67 U1.26
  Bottom 0.254: J4.1 40.06,42.8 40.44,42.42 42.98,42.42 43.23,42.16 43.23,41.61 R13.2 43.27,39.84 43.48,39.62 49.83,39.62 v51.92,42.47
TEMP7  (via drill 0.38)
  Top 0.254: v52.68,41.66 53.94,41.66 U1.27
  Bottom 0.254: v52.68,41.66 50.09,39.12 42.72,39.12 42.47,39.37 R13.3 42.47,40.9 42.47,40.79 39.42,40.79 38.66,41.66 38.66,57.02 J5.2
TFET  (via drill 0.36, 0.38)
  Top 0.254: v58.34,45.21 58.34,45.87 U1.19 | v51.93,44.2 50.69,43.94 R46.2
  Bottom 0.254: v51.93,44.2 55.36,44.2 57.14,45.21 v58.34,45.21
TX1  (via drill 0.38)
  Top 0.254: U1.44 63.88,27.86 65.46,26.29 65.46,23.24 66.47,22.35 70.54,22.35 v71.04,22.86
  Top 0.406: D9.C 69.9,24.13 v71.04,22.86
  Bottom 0.406: v71.04,22.86 U4.4
U4  (via drill 0.38)
  Top 0.254: v63.04,29.59 63.04,35.15 U1.43
  Bottom 0.254: U4.3 U4.2 68.5,24.13 v63.04,29.59
VDD1  (via drill 0.38)
  Top 0.254: v64.12,41.78 U1.7
  Bottom 0.254: C10.1 64.29,41.76 v64.12,41.78
VEXTERNAL  (via drill 0.38)
  Top 0.254: v73.2,31.62 73.2,33.02 71.81,34.42 71.81,43.94 71.04,44.7 67.23,44.7 66.98,44.96 65.73,44.96 U1.11
  Bottom 0.254: R48.1 R49.2 | R49.2 77.7,25.74 C1.1 | R49.2 78.08,27 77.77,27.3 77.52,27.3 v73.2,31.62
VREF1  (via drill 0.38)
  Top 0.178: U2.35 20.79,26.71 20.98,26.39 v21.59,26.39
  Bottom 0.178: v21.59,26.39 21.59,27.45 C22.1
VREF2  (via drill 0.38)
  Top 0.178: U2.34 20.29,26.74 20.07,26.45 v19.56,26.45
  Bottom 0.178: v19.56,26.45 19.56,27.5 C21.1
VREG  (via drill 0.38)
  Top 0.178: U2.45 25.79,27.04 v25.81,27.03
  Top 0.254: U2.47 U2.46 U2.45
  Bottom 0.178: R47.2 24.89,27.28 25.15,27.03 v25.81,27.03 26.47,27.03 26.72,27.28 C23.1

## Text on the board
_tNames: G. Synek | R. Johnson